# Altium PCB RGBM.PcbDoc (part 3 of 3)
Units mil, origin at the board's own origin, x right, y up, seen from the top; angles counter-clockwise.
Board outline 10650 x 5000 mil, 2 copper layers (Top Layer, Bottom Layer); 598 components, 309 nets, 1806 pads, 0 vias.
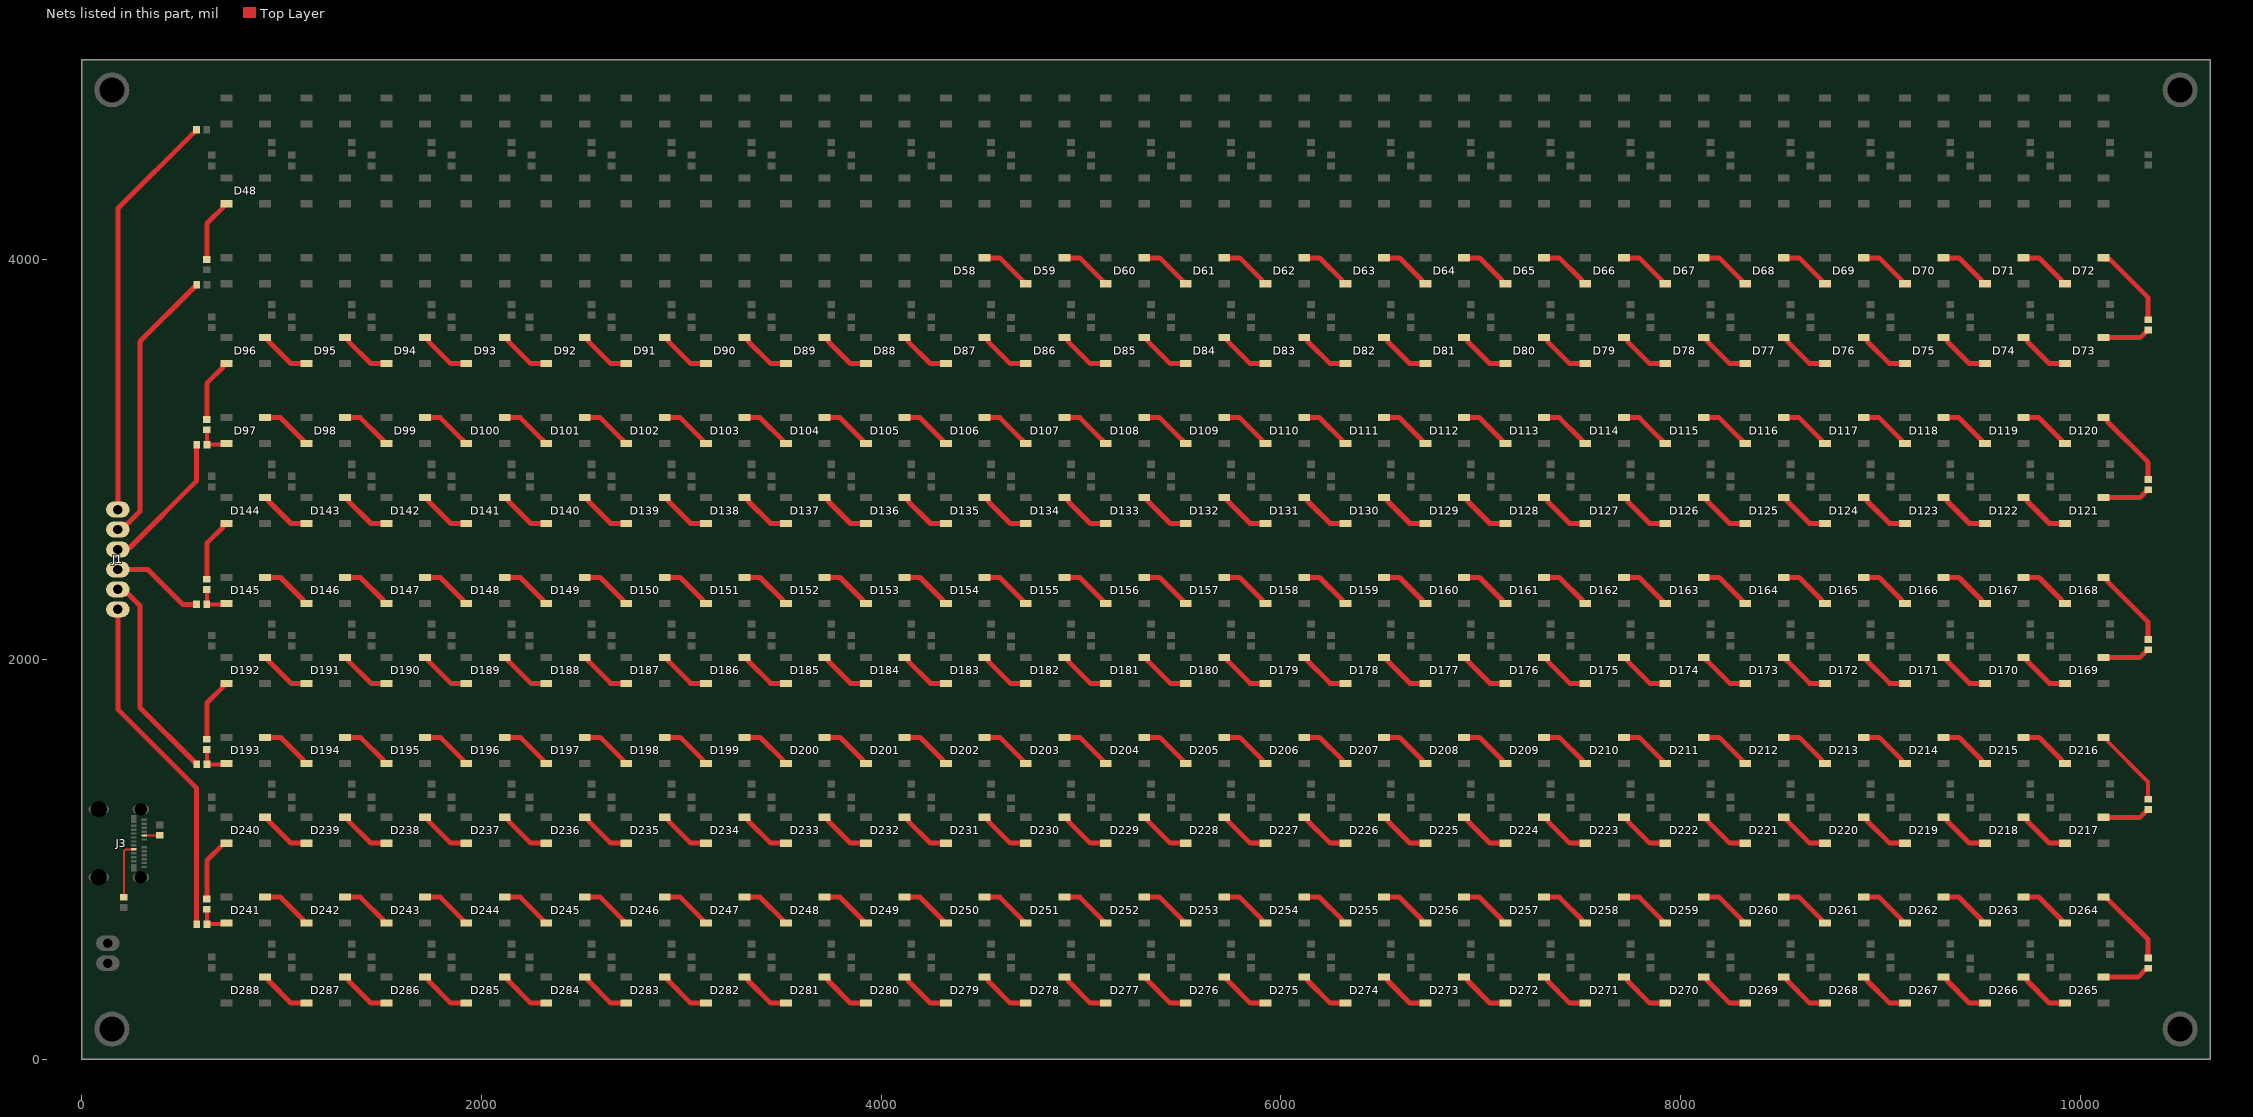
[diagram p3: the nets of this part, all layers, seen from the top]

## Nets (pads, with @x,y where several pads share a name; then routed paths per layer and width w, separated by ;. In a path a pad name is that pad's centre, name@x,y a point inside that pad or via, vN(x,y) a via of type N, cw(c..) or ccw(c..) an arc to the next point about the centre after c; other vN are vias at no path point) (continued)
NetD58_2-DOUT: D58.2-DOUT D59.4-DIN | length 267.8
  Top Layer w25: D58.2-DOUT@4516.46,4009.96 4593.62,4009.96 4706.52,3897.07 4706.52,3885.26 4711.73,3880.04 D59.4-DIN@4723.54,3880.04
NetD59_2-DOUT: D59.2-DOUT D60.4-DIN | length 267.8
  Top Layer w25: D59.2-DOUT@4916.46,4009.96 4993.62,4009.96 5106.52,3897.07 5106.52,3885.26 5111.73,3880.04 D60.4-DIN@5123.54,3880.04
NetD60_2-DOUT: D60.2-DOUT D61.4-DIN | length 267.8
  Top Layer w25: D60.2-DOUT@5316.46,4009.96 5393.62,4009.96 5506.52,3897.07 5506.52,3885.26 5511.73,3880.04 D61.4-DIN@5523.54,3880.04
NetD61_2-DOUT: D61.2-DOUT D62.4-DIN | length 267.8
  Top Layer w25: D61.2-DOUT@5716.46,4009.96 5793.62,4009.96 5906.52,3897.07 5906.52,3885.26 5911.73,3880.04 D62.4-DIN@5923.54,3880.04
NetD62_2-DOUT: D62.2-DOUT D63.4-DIN | length 267.8
  Top Layer w25: D62.2-DOUT@6116.46,4009.96 6193.62,4009.96 6306.52,3897.07 6306.52,3885.26 6311.73,3880.04 D63.4-DIN@6323.54,3880.04
NetD63_2-DOUT: D63.2-DOUT D64.4-DIN | length 267.8
  Top Layer w25: D63.2-DOUT@6516.46,4009.96 6593.62,4009.96 6706.52,3897.07 6706.52,3885.26 6711.73,3880.04 D64.4-DIN@6723.54,3880.04
NetD64_2-DOUT: D64.2-DOUT D65.4-DIN | length 267.8
  Top Layer w25: D64.2-DOUT@6916.46,4009.96 6993.62,4009.96 7106.52,3897.07 7106.52,3885.26 7111.73,3880.04 D65.4-DIN@7123.54,3880.04
NetD65_2-DOUT: D65.2-DOUT D66.4-DIN | length 267.8
  Top Layer w25: D65.2-DOUT@7316.46,4009.96 7393.62,4009.96 7506.52,3897.07 7506.52,3885.26 7511.73,3880.04 D66.4-DIN@7523.54,3880.04
NetD66_2-DOUT: D66.2-DOUT D67.4-DIN | length 267.8
  Top Layer w25: D66.2-DOUT@7716.46,4009.96 7793.62,4009.96 7906.52,3897.07 7906.52,3885.26 7911.73,3880.04 D67.4-DIN@7923.54,3880.04
NetD67_2-DOUT: D67.2-DOUT D68.4-DIN | length 267.8
  Top Layer w25: D67.2-DOUT@8116.46,4009.96 8193.62,4009.96 8306.52,3897.07 8306.52,3885.26 8311.73,3880.04 D68.4-DIN@8323.54,3880.04
NetD68_2-DOUT: D68.2-DOUT D69.4-DIN | length 267.8
  Top Layer w25: D68.2-DOUT@8516.46,4009.96 8593.62,4009.96 8706.52,3897.07 8706.52,3885.26 8711.73,3880.04 D69.4-DIN@8723.54,3880.04
NetD69_2-DOUT: D69.2-DOUT D70.4-DIN | length 267.8
  Top Layer w25: D69.2-DOUT@8916.46,4009.96 8993.62,4009.96 9106.52,3897.07 9106.52,3885.26 9111.73,3880.04 D70.4-DIN@9123.54,3880.04
NetD70_2-DOUT: D70.2-DOUT D71.4-DIN | length 267.8
  Top Layer w25: D70.2-DOUT@9316.46,4009.96 9393.62,4009.96 9506.52,3897.07 9506.52,3885.26 9511.73,3880.04 D71.4-DIN@9523.54,3880.04
NetD71_2-DOUT: D71.2-DOUT D72.4-DIN | length 267.8
  Top Layer w25: D71.2-DOUT@9716.46,4009.96 9793.62,4009.96 9906.52,3897.07 9906.52,3885.26 9911.73,3880.04 D72.4-DIN@9923.54,3880.04
NetD72_2-DOUT: D72.2-DOUT R5.2 | length 420.6
  Top Layer w25: D72.2-DOUT@10116.46,4009.96 10121.67,4004.74 10145.26,4004.74 10340,3810 R5.2@10340,3695.77
NetD73_2-DOUT: D73.2-DOUT D74.4-DIN | length 267.8
  Top Layer w25: D74.4-DIN@9716.46,3609.96 9728.27,3609.96 9733.48,3604.74 9733.48,3592.93 9846.38,3480.04 D73.2-DOUT@9923.54,3480.04
NetD73_4-DIN: D73.4-DIN R5.1 | length 229.3
  Top Layer w25: D73.4-DIN@10116.46,3609.96 10299.96,3609.96 R5.1@10332.36,3642.36
NetD74_2-DOUT: D74.2-DOUT D75.4-DIN | length 267.8
  Top Layer w25: D75.4-DIN@9316.46,3609.96 9328.27,3609.96 9333.48,3604.74 9333.48,3592.93 9446.38,3480.04 D74.2-DOUT@9523.54,3480.04
NetD75_2-DOUT: D75.2-DOUT D76.4-DIN | length 267.8
  Top Layer w25: D76.4-DIN@8916.46,3609.96 8928.27,3609.96 8933.48,3604.74 8933.48,3592.93 9046.38,3480.04 D75.2-DOUT@9123.54,3480.04
NetD76_2-DOUT: D76.2-DOUT D77.4-DIN | length 267.8
  Top Layer w25: D77.4-DIN@8516.46,3609.96 8528.27,3609.96 8533.48,3604.74 8533.48,3592.93 8646.38,3480.04 D76.2-DOUT@8723.54,3480.04
NetD77_2-DOUT: D77.2-DOUT D78.4-DIN | length 267.8
  Top Layer w25: D78.4-DIN@8116.46,3609.96 8128.27,3609.96 8133.48,3604.74 8133.48,3592.93 8246.38,3480.04 D77.2-DOUT@8323.54,3480.04
NetD78_2-DOUT: D78.2-DOUT D79.4-DIN | length 267.8
  Top Layer w25: D79.4-DIN@7716.46,3609.96 7728.27,3609.96 7733.48,3604.74 7733.48,3592.93 7846.38,3480.04 D78.2-DOUT@7923.54,3480.04
NetD79_2-DOUT: D79.2-DOUT D80.4-DIN | length 267.8
  Top Layer w25: D80.4-DIN@7316.46,3609.96 7328.27,3609.96 7333.48,3604.74 7333.48,3592.93 7446.38,3480.04 D79.2-DOUT@7523.54,3480.04
NetD80_2-DOUT: D80.2-DOUT D81.4-DIN | length 267.8
  Top Layer w25: D81.4-DIN@6916.46,3609.96 6928.27,3609.96 6933.48,3604.74 6933.48,3592.93 7046.38,3480.04 D80.2-DOUT@7123.54,3480.04
NetD81_2-DOUT: D81.2-DOUT D82.4-DIN | length 267.8
  Top Layer w25: D82.4-DIN@6516.46,3609.96 6528.27,3609.96 6533.48,3604.74 6533.48,3592.93 6646.38,3480.04 D81.2-DOUT@6723.54,3480.04
NetD82_2-DOUT: D82.2-DOUT D83.4-DIN | length 267.8
  Top Layer w25: D83.4-DIN@6116.46,3609.96 6128.27,3609.96 6133.48,3604.74 6133.48,3592.93 6246.38,3480.04 D82.2-DOUT@6323.54,3480.04
NetD83_2-DOUT: D83.2-DOUT D84.4-DIN | length 267.8
  Top Layer w25: D84.4-DIN@5716.46,3609.96 5728.27,3609.96 5733.48,3604.74 5733.48,3592.93 5846.38,3480.04 D83.2-DOUT@5923.54,3480.04
NetD84_2-DOUT: D84.2-DOUT D85.4-DIN | length 267.8
  Top Layer w25: D85.4-DIN@5316.46,3609.96 5328.27,3609.96 5333.48,3604.74 5333.48,3592.93 5446.38,3480.04 D84.2-DOUT@5523.54,3480.04
NetD85_2-DOUT: D85.2-DOUT D86.4-DIN | length 267.8
  Top Layer w25: D86.4-DIN@4916.46,3609.96 4928.27,3609.96 4933.48,3604.74 4933.48,3592.93 5046.38,3480.04 D85.2-DOUT@5123.54,3480.04
NetD86_2-DOUT: D86.2-DOUT D87.4-DIN | length 267.8
  Top Layer w25: D87.4-DIN@4516.46,3609.96 4528.27,3609.96 4533.48,3604.74 4533.48,3592.93 4646.38,3480.04 D86.2-DOUT@4723.54,3480.04
NetD87_2-DOUT: D87.2-DOUT D88.4-DIN | length 267.8
  Top Layer w25: D88.4-DIN@4116.46,3609.96 4128.27,3609.96 4133.48,3604.74 4133.48,3592.93 4246.38,3480.04 D87.2-DOUT@4323.54,3480.04
NetD88_2-DOUT: D88.2-DOUT D89.4-DIN | length 267.8
  Top Layer w25: D89.4-DIN@3716.46,3609.96 3728.27,3609.96 3733.48,3604.74 3733.48,3592.93 3846.38,3480.04 D88.2-DOUT@3923.54,3480.04
NetD89_2-DOUT: D89.2-DOUT D90.4-DIN | length 267.8
  Top Layer w25: D90.4-DIN@3316.46,3609.96 3328.27,3609.96 3333.48,3604.74 3333.48,3592.93 3446.38,3480.04 D89.2-DOUT@3523.54,3480.04
NetD90_2-DOUT: D90.2-DOUT D91.4-DIN | length 267.8
  Top Layer w25: D91.4-DIN@2916.46,3609.96 2928.27,3609.96 2933.48,3604.74 2933.48,3592.93 3046.38,3480.04 D90.2-DOUT@3123.54,3480.04
NetD91_2-DOUT: D91.2-DOUT D92.4-DIN | length 267.8
  Top Layer w25: D92.4-DIN@2516.46,3609.96 2528.27,3609.96 2533.48,3604.74 2533.48,3592.93 2646.38,3480.04 D91.2-DOUT@2723.54,3480.04
NetD92_2-DOUT: D92.2-DOUT D93.4-DIN | length 267.8
  Top Layer w25: D93.4-DIN@2116.46,3609.96 2128.27,3609.96 2133.48,3604.74 2133.48,3592.93 2246.38,3480.04 D92.2-DOUT@2323.54,3480.04
NetD93_2-DOUT: D93.2-DOUT D94.4-DIN | length 267.8
  Top Layer w25: D94.4-DIN@1716.46,3609.96 1728.27,3609.96 1733.48,3604.74 1733.48,3592.93 1846.38,3480.04 D93.2-DOUT@1923.54,3480.04
NetD94_2-DOUT: D94.2-DOUT D95.4-DIN | length 267.8
  Top Layer w25: D95.4-DIN@1316.46,3609.96 1328.27,3609.96 1333.48,3604.74 1333.48,3592.93 1446.38,3480.04 D94.2-DOUT@1523.54,3480.04
NetD95_2-DOUT: D95.2-DOUT D96.4-DIN | length 267.8
  Top Layer w25: D96.4-DIN@916.46,3609.96 928.27,3609.96 933.48,3604.74 933.48,3592.93 1046.38,3480.04 D95.2-DOUT@1123.54,3480.04
NetD97_2-DOUT: D97.2-DOUT D98.4-DIN | length 267.8
  Top Layer w25: D97.2-DOUT@916.46,3209.96 993.62,3209.96 1106.52,3097.07 1106.52,3085.26 1111.73,3080.04 D98.4-DIN@1123.54,3080.04
NetD97_4-DIN: D97.4-DIN R6.1 R7.2 | length 174.7
  Top Layer w20: R6.1@625,3149.41 625,3075.59 R7.2@625.59,3075 718.5,3075 D97.4-DIN@723.54,3080.04
NetD98_2-DOUT: D98.2-DOUT D99.4-DIN | length 267.8
  Top Layer w25: D98.2-DOUT@1316.46,3209.96 1393.62,3209.96 1506.52,3097.07 1506.52,3085.26 1511.73,3080.04 D99.4-DIN@1523.54,3080.04
NetD99_2-DOUT: D99.2-DOUT D100.4-DIN | length 267.8
  Top Layer w25: D99.2-DOUT@1716.46,3209.96 1793.62,3209.96 1906.52,3097.07 1906.52,3085.26 1911.73,3080.04 D100.4-DIN@1923.54,3080.04
NetD100_2-DOUT: D100.2-DOUT D101.4-DIN | length 267.8
  Top Layer w25: D100.2-DOUT@2116.46,3209.96 2193.62,3209.96 2306.52,3097.07 2306.52,3085.26 2311.73,3080.04 D101.4-DIN@2323.54,3080.04
NetD101_2-DOUT: D101.2-DOUT D102.4-DIN | length 267.8
  Top Layer w25: D101.2-DOUT@2516.46,3209.96 2593.62,3209.96 2706.52,3097.07 2706.52,3085.26 2711.73,3080.04 D102.4-DIN@2723.54,3080.04
NetD102_2-DOUT: D102.2-DOUT D103.4-DIN | length 267.8
  Top Layer w25: D102.2-DOUT@2916.46,3209.96 2993.62,3209.96 3106.52,3097.07 3106.52,3085.26 3111.73,3080.04 D103.4-DIN@3123.54,3080.04
NetD103_2-DOUT: D103.2-DOUT D104.4-DIN | length 267.8
  Top Layer w25: D103.2-DOUT@3316.46,3209.96 3393.62,3209.96 3506.52,3097.07 3506.52,3085.26 3511.73,3080.04 D104.4-DIN@3523.54,3080.04
NetD104_2-DOUT: D104.2-DOUT D105.4-DIN | length 267.8
  Top Layer w25: D104.2-DOUT@3716.46,3209.96 3793.62,3209.96 3906.52,3097.07 3906.52,3085.26 3911.73,3080.04 D105.4-DIN@3923.54,3080.04
NetD105_2-DOUT: D105.2-DOUT D106.4-DIN | length 267.8
  Top Layer w25: D105.2-DOUT@4116.46,3209.96 4193.62,3209.96 4306.52,3097.07 4306.52,3085.26 4311.73,3080.04 D106.4-DIN@4323.54,3080.04
NetD106_2-DOUT: D106.2-DOUT D107.4-DIN | length 267.8
  Top Layer w25: D106.2-DOUT@4516.46,3209.96 4593.62,3209.96 4706.52,3097.07 4706.52,3085.26 4711.73,3080.04 D107.4-DIN@4723.54,3080.04
NetD107_2-DOUT: D107.2-DOUT D108.4-DIN | length 267.8
  Top Layer w25: D107.2-DOUT@4916.46,3209.96 4993.62,3209.96 5106.52,3097.07 5106.52,3085.26 5111.73,3080.04 D108.4-DIN@5123.54,3080.04
NetD108_2-DOUT: D108.2-DOUT D109.4-DIN | length 267.8
  Top Layer w25: D108.2-DOUT@5316.46,3209.96 5393.62,3209.96 5506.52,3097.07 5506.52,3085.26 5511.73,3080.04 D109.4-DIN@5523.54,3080.04
NetD109_2-DOUT: D109.2-DOUT D110.4-DIN | length 267.8
  Top Layer w25: D109.2-DOUT@5716.46,3209.96 5793.62,3209.96 5906.52,3097.07 5906.52,3085.26 5911.73,3080.04 D110.4-DIN@5923.54,3080.04
NetD110_2-DOUT: D110.2-DOUT D111.4-DIN | length 267.8
  Top Layer w25: D110.2-DOUT@6116.46,3209.96 6193.62,3209.96 6306.52,3097.07 6306.52,3085.26 6311.73,3080.04 D111.4-DIN@6323.54,3080.04
NetD111_2-DOUT: D111.2-DOUT D112.4-DIN | length 267.8
  Top Layer w25: D111.2-DOUT@6516.46,3209.96 6593.62,3209.96 6706.52,3097.07 6706.52,3085.26 6711.73,3080.04 D112.4-DIN@6723.54,3080.04
NetD112_2-DOUT: D112.2-DOUT D113.4-DIN | length 267.8
  Top Layer w25: D112.2-DOUT@6916.46,3209.96 6993.62,3209.96 7106.52,3097.07 7106.52,3085.26 7111.73,3080.04 D113.4-DIN@7123.54,3080.04
NetD113_2-DOUT: D113.2-DOUT D114.4-DIN | length 267.8
  Top Layer w25: D113.2-DOUT@7316.46,3209.96 7393.62,3209.96 7506.52,3097.07 7506.52,3085.26 7511.73,3080.04 D114.4-DIN@7523.54,3080.04
NetD114_2-DOUT: D114.2-DOUT D115.4-DIN | length 267.8
  Top Layer w25: D114.2-DOUT@7716.46,3209.96 7793.62,3209.96 7906.52,3097.07 7906.52,3085.26 7911.73,3080.04 D115.4-DIN@7923.54,3080.04
NetD115_2-DOUT: D115.2-DOUT D116.4-DIN | length 267.8
  Top Layer w25: D115.2-DOUT@8116.46,3209.96 8193.62,3209.96 8306.52,3097.07 8306.52,3085.26 8311.73,3080.04 D116.4-DIN@8323.54,3080.04
NetD116_2-DOUT: D116.2-DOUT D117.4-DIN | length 267.8
  Top Layer w25: D116.2-DOUT@8516.46,3209.96 8593.62,3209.96 8706.52,3097.07 8706.52,3085.26 8711.73,3080.04 D117.4-DIN@8723.54,3080.04
NetD117_2-DOUT: D117.2-DOUT D118.4-DIN | length 267.8
  Top Layer w25: D117.2-DOUT@8916.46,3209.96 8993.62,3209.96 9106.52,3097.07 9106.52,3085.26 9111.73,3080.04 D118.4-DIN@9123.54,3080.04
NetD118_2-DOUT: D118.2-DOUT D119.4-DIN | length 267.8
  Top Layer w25: D118.2-DOUT@9316.46,3209.96 9393.62,3209.96 9506.52,3097.07 9506.52,3085.26 9511.73,3080.04 D119.4-DIN@9523.54,3080.04
NetD119_2-DOUT: D119.2-DOUT D120.4-DIN | length 267.8
  Top Layer w25: D119.2-DOUT@9716.46,3209.96 9793.62,3209.96 9906.52,3097.07 9906.52,3085.26 9911.73,3080.04 D120.4-DIN@9923.54,3080.04
NetD120_2-DOUT: D120.2-DOUT R8.2 | length 413.7
  Top Layer w25: D120.2-DOUT@10116.46,3209.96 10128.27,3209.96 10133.48,3204.74 10133.48,3192.93 10340,2986.42 R8.2@10340,2895.77
NetD121_2-DOUT: D121.2-DOUT D122.4-DIN | length 267.8
  Top Layer w25: D122.4-DIN@9716.46,2809.96 9728.27,2809.96 9733.48,2804.74 9733.48,2792.93 9846.38,2680.04 D121.2-DOUT@9923.54,2680.04
NetD121_4-DIN: D121.4-DIN R8.1 | length 242.8
  Top Layer w25: D121.4-DIN@10116.46,2809.96 10299.96,2809.96 10333.8,2843.8 10333.8,2844.59 10340.78,2851.57 R8.1@10341.57,2851.57
NetD122_2-DOUT: D122.2-DOUT D123.4-DIN | length 267.8
  Top Layer w25: D123.4-DIN@9316.46,2809.96 9328.27,2809.96 9333.48,2804.74 9333.48,2792.93 9446.38,2680.04 D122.2-DOUT@9523.54,2680.04
NetD123_2-DOUT: D123.2-DOUT D124.4-DIN | length 267.8
  Top Layer w25: D124.4-DIN@8916.46,2809.96 8928.27,2809.96 8933.48,2804.74 8933.48,2792.93 9046.38,2680.04 D123.2-DOUT@9123.54,2680.04
NetD124_2-DOUT: D124.2-DOUT D125.4-DIN | length 267.8
  Top Layer w25: D125.4-DIN@8516.46,2809.96 8528.27,2809.96 8533.48,2804.74 8533.48,2792.93 8646.38,2680.04 D124.2-DOUT@8723.54,2680.04
NetD125_2-DOUT: D125.2-DOUT D126.4-DIN | length 267.8
  Top Layer w25: D126.4-DIN@8116.46,2809.96 8128.27,2809.96 8133.48,2804.74 8133.48,2792.93 8246.38,2680.04 D125.2-DOUT@8323.54,2680.04
NetD126_2-DOUT: D126.2-DOUT D127.4-DIN | length 267.8
  Top Layer w25: D127.4-DIN@7716.46,2809.96 7728.27,2809.96 7733.48,2804.74 7733.48,2792.93 7846.38,2680.04 D126.2-DOUT@7923.54,2680.04
NetD127_2-DOUT: D127.2-DOUT D128.4-DIN | length 267.8
  Top Layer w25: D128.4-DIN@7316.46,2809.96 7328.27,2809.96 7333.48,2804.74 7333.48,2792.93 7446.38,2680.04 D127.2-DOUT@7523.54,2680.04
NetD128_2-DOUT: D128.2-DOUT D129.4-DIN | length 267.8
  Top Layer w25: D129.4-DIN@6916.46,2809.96 6928.27,2809.96 6933.48,2804.74 6933.48,2792.93 7046.38,2680.04 D128.2-DOUT@7123.54,2680.04
NetD129_2-DOUT: D129.2-DOUT D130.4-DIN | length 267.8
  Top Layer w25: D130.4-DIN@6516.46,2809.96 6528.27,2809.96 6533.48,2804.74 6533.48,2792.93 6646.38,2680.04 D129.2-DOUT@6723.54,2680.04
NetD130_2-DOUT: D130.2-DOUT D131.4-DIN | length 267.8
  Top Layer w25: D131.4-DIN@6116.46,2809.96 6128.27,2809.96 6133.48,2804.74 6133.48,2792.93 6246.38,2680.04 D130.2-DOUT@6323.54,2680.04
NetD131_2-DOUT: D131.2-DOUT D132.4-DIN | length 267.8
  Top Layer w25: D132.4-DIN@5716.46,2809.96 5728.27,2809.96 5733.48,2804.74 5733.48,2792.93 5846.38,2680.04 D131.2-DOUT@5923.54,2680.04
NetD132_2-DOUT: D132.2-DOUT D133.4-DIN | length 267.8
  Top Layer w25: D133.4-DIN@5316.46,2809.96 5328.27,2809.96 5333.48,2804.74 5333.48,2792.93 5446.38,2680.04 D132.2-DOUT@5523.54,2680.04
NetD133_2-DOUT: D133.2-DOUT D134.4-DIN | length 267.8
  Top Layer w25: D134.4-DIN@4916.46,2809.96 4928.27,2809.96 4933.48,2804.74 4933.48,2792.93 5046.38,2680.04 D133.2-DOUT@5123.54,2680.04
NetD134_2-DOUT: D134.2-DOUT D135.4-DIN | length 267.8
  Top Layer w25: D135.4-DIN@4516.46,2809.96 4528.27,2809.96 4533.48,2804.74 4533.48,2792.93 4646.38,2680.04 D134.2-DOUT@4723.54,2680.04
NetD135_2-DOUT: D135.2-DOUT D136.4-DIN | length 267.8
  Top Layer w25: D136.4-DIN@4116.46,2809.96 4128.27,2809.96 4133.48,2804.74 4133.48,2792.93 4246.38,2680.04 D135.2-DOUT@4323.54,2680.04
NetD136_2-DOUT: D136.2-DOUT D137.4-DIN | length 267.8
  Top Layer w25: D137.4-DIN@3716.46,2809.96 3728.27,2809.96 3733.48,2804.74 3733.48,2792.93 3846.38,2680.04 D136.2-DOUT@3923.54,2680.04
NetD137_2-DOUT: D137.2-DOUT D138.4-DIN | length 267.8
  Top Layer w25: D138.4-DIN@3316.46,2809.96 3328.27,2809.96 3333.48,2804.74 3333.48,2792.93 3446.38,2680.04 D137.2-DOUT@3523.54,2680.04
NetD138_2-DOUT: D138.2-DOUT D139.4-DIN | length 267.8
  Top Layer w25: D139.4-DIN@2916.46,2809.96 2928.27,2809.96 2933.48,2804.74 2933.48,2792.93 3046.38,2680.04 D138.2-DOUT@3123.54,2680.04
NetD139_2-DOUT: D139.2-DOUT D140.4-DIN | length 267.8
  Top Layer w25: D140.4-DIN@2516.46,2809.96 2528.27,2809.96 2533.48,2804.74 2533.48,2792.93 2646.38,2680.04 D139.2-DOUT@2723.54,2680.04
NetD140_2-DOUT: D140.2-DOUT D141.4-DIN | length 267.8
  Top Layer w25: D141.4-DIN@2116.46,2809.96 2128.27,2809.96 2133.48,2804.74 2133.48,2792.93 2246.38,2680.04 D140.2-DOUT@2323.54,2680.04
NetD141_2-DOUT: D141.2-DOUT D142.4-DIN | length 267.8
  Top Layer w25: D142.4-DIN@1716.46,2809.96 1728.27,2809.96 1733.48,2804.74 1733.48,2792.93 1846.38,2680.04 D141.2-DOUT@1923.54,2680.04
NetD142_2-DOUT: D142.2-DOUT D143.4-DIN | length 267.8
  Top Layer w25: D143.4-DIN@1316.46,2809.96 1328.27,2809.96 1333.48,2804.74 1333.48,2792.93 1446.38,2680.04 D142.2-DOUT@1523.54,2680.04
NetD143_2-DOUT: D143.2-DOUT D144.4-DIN | length 267.8
  Top Layer w25: D144.4-DIN@916.46,2809.96 928.27,2809.96 933.48,2804.74 933.48,2792.93 1046.38,2680.04 D143.2-DOUT@1123.54,2680.04
NetD145_2-DOUT: D145.2-DOUT D146.4-DIN | length 267.8
  Top Layer w25: D145.2-DOUT@916.46,2409.96 993.62,2409.96 1106.52,2297.07 1106.52,2285.26 1111.73,2280.04 D146.4-DIN@1123.54,2280.04
NetD145_4-DIN: D145.4-DIN R9.1 R10.2 | length 175
  Top Layer w20: R9.1@625,2349.41 R10.2@625,2275 718.5,2275 D145.4-DIN@723.54,2280.04
NetD146_2-DOUT: D146.2-DOUT D147.4-DIN | length 267.8
  Top Layer w25: D146.2-DOUT@1316.46,2409.96 1393.62,2409.96 1506.52,2297.07 1506.52,2285.26 1511.73,2280.04 D147.4-DIN@1523.54,2280.04
NetD147_2-DOUT: D147.2-DOUT D148.4-DIN | length 267.8
  Top Layer w25: D147.2-DOUT@1716.46,2409.96 1793.62,2409.96 1906.52,2297.07 1906.52,2285.26 1911.73,2280.04 D148.4-DIN@1923.54,2280.04
NetD148_2-DOUT: D148.2-DOUT D149.4-DIN | length 267.8
  Top Layer w25: D148.2-DOUT@2116.46,2409.96 2193.62,2409.96 2306.52,2297.07 2306.52,2285.26 2311.73,2280.04 D149.4-DIN@2323.54,2280.04
NetD149_2-DOUT: D149.2-DOUT D150.4-DIN | length 267.8
  Top Layer w25: D149.2-DOUT@2516.46,2409.96 2593.62,2409.96 2706.52,2297.07 2706.52,2285.26 2711.73,2280.04 D150.4-DIN@2723.54,2280.04
NetD150_2-DOUT: D150.2-DOUT D151.4-DIN | length 267.8
  Top Layer w25: D150.2-DOUT@2916.46,2409.96 2993.62,2409.96 3106.52,2297.07 3106.52,2285.26 3111.73,2280.04 D151.4-DIN@3123.54,2280.04
NetD151_2-DOUT: D151.2-DOUT D152.4-DIN | length 267.8
  Top Layer w25: D151.2-DOUT@3316.46,2409.96 3393.62,2409.96 3506.52,2297.07 3506.52,2285.26 3511.73,2280.04 D152.4-DIN@3523.54,2280.04
NetD152_2-DOUT: D152.2-DOUT D153.4-DIN | length 267.8
  Top Layer w25: D152.2-DOUT@3716.46,2409.96 3793.62,2409.96 3906.52,2297.07 3906.52,2285.26 3911.73,2280.04 D153.4-DIN@3923.54,2280.04
NetD153_2-DOUT: D153.2-DOUT D154.4-DIN | length 267.8
  Top Layer w25: D153.2-DOUT@4116.46,2409.96 4193.62,2409.96 4306.52,2297.07 4306.52,2285.26 4311.73,2280.04 D154.4-DIN@4323.54,2280.04
NetD154_2-DOUT: D154.2-DOUT D155.4-DIN | length 267.8
  Top Layer w25: D154.2-DOUT@4516.46,2409.96 4593.62,2409.96 4706.52,2297.07 4706.52,2285.26 4711.73,2280.04 D155.4-DIN@4723.54,2280.04
NetD155_2-DOUT: D155.2-DOUT D156.4-DIN | length 267.8
  Top Layer w25: D155.2-DOUT@4916.46,2409.96 4993.62,2409.96 5106.52,2297.07 5106.52,2285.26 5111.73,2280.04 D156.4-DIN@5123.54,2280.04
NetD156_2-DOUT: D156.2-DOUT D157.4-DIN | length 267.8
  Top Layer w25: D156.2-DOUT@5316.46,2409.96 5393.62,2409.96 5506.52,2297.07 5506.52,2285.26 5511.73,2280.04 D157.4-DIN@5523.54,2280.04
NetD157_2-DOUT: D157.2-DOUT D158.4-DIN | length 267.8
  Top Layer w25: D157.2-DOUT@5716.46,2409.96 5793.62,2409.96 5906.52,2297.07 5906.52,2285.26 5911.73,2280.04 D158.4-DIN@5923.54,2280.04
NetD158_2-DOUT: D158.2-DOUT D159.4-DIN | length 267.8
  Top Layer w25: D158.2-DOUT@6116.46,2409.96 6193.62,2409.96 6306.52,2297.07 6306.52,2285.26 6311.73,2280.04 D159.4-DIN@6323.54,2280.04
NetD159_2-DOUT: D159.2-DOUT D160.4-DIN | length 267.8
  Top Layer w25: D159.2-DOUT@6516.46,2409.96 6593.62,2409.96 6706.52,2297.07 6706.52,2285.26 6711.73,2280.04 D160.4-DIN@6723.54,2280.04
NetD160_2-DOUT: D160.2-DOUT D161.4-DIN | length 267.8
  Top Layer w25: D160.2-DOUT@6916.46,2409.96 6993.62,2409.96 7106.52,2297.07 7106.52,2285.26 7111.73,2280.04 D161.4-DIN@7123.54,2280.04
NetD161_2-DOUT: D161.2-DOUT D162.4-DIN | length 267.8
  Top Layer w25: D161.2-DOUT@7316.46,2409.96 7393.62,2409.96 7506.52,2297.07 7506.52,2285.26 7511.73,2280.04 D162.4-DIN@7523.54,2280.04
NetD162_2-DOUT: D162.2-DOUT D163.4-DIN | length 267.8
  Top Layer w25: D162.2-DOUT@7716.46,2409.96 7793.62,2409.96 7906.52,2297.07 7906.52,2285.26 7911.73,2280.04 D163.4-DIN@7923.54,2280.04
NetD163_2-DOUT: D163.2-DOUT D164.4-DIN | length 267.8
  Top Layer w25: D163.2-DOUT@8116.46,2409.96 8193.62,2409.96 8306.52,2297.07 8306.52,2285.26 8311.73,2280.04 D164.4-DIN@8323.54,2280.04
NetD164_2-DOUT: D164.2-DOUT D165.4-DIN | length 267.8
  Top Layer w25: D164.2-DOUT@8516.46,2409.96 8593.62,2409.96 8706.52,2297.07 8706.52,2285.26 8711.73,2280.04 D165.4-DIN@8723.54,2280.04
NetD165_2-DOUT: D165.2-DOUT D166.4-DIN | length 267.8
  Top Layer w25: D165.2-DOUT@8916.46,2409.96 8993.62,2409.96 9106.52,2297.07 9106.52,2285.26 9111.73,2280.04 D166.4-DIN@9123.54,2280.04
NetD166_2-DOUT: D166.2-DOUT D167.4-DIN | length 267.8
  Top Layer w25: D166.2-DOUT@9316.46,2409.96 9393.62,2409.96 9506.52,2297.07 9506.52,2285.26 9511.73,2280.04 D167.4-DIN@9523.54,2280.04
NetD167_2-DOUT: D167.2-DOUT D168.4-DIN | length 267.8
  Top Layer w25: D167.2-DOUT@9716.46,2409.96 9793.62,2409.96 9906.52,2297.07 9906.52,2285.26 9911.73,2280.04 D168.4-DIN@9923.54,2280.04
NetD168_2-DOUT: D168.2-DOUT R11.2 | length 405.2
  Top Layer w25: D168.2-DOUT@10116.46,2409.96 10128.27,2409.96 10133.48,2404.74 10133.48,2392.93 10340,2186.42 R11.2@10340,2104.23
NetD169_2-DOUT: D169.2-DOUT D170.4-DIN | length 267.8
  Top Layer w25: D170.4-DIN@9716.46,2009.96 9728.27,2009.96 9733.48,2004.74 9733.48,1992.93 9846.38,1880.04 D169.2-DOUT@9923.54,1880.04
NetD169_4-DIN: D169.4-DIN R11.1 | length 226.2
  Top Layer w25: D169.4-DIN@10116.46,2009.96 D169.4-DIN@10116.46,2009.96 10300,2010 R11.1@10330.18,2040.18
NetD170_2-DOUT: D170.2-DOUT D171.4-DIN | length 267.8
  Top Layer w25: D171.4-DIN@9316.46,2009.96 9328.27,2009.96 9333.48,2004.74 9333.48,1992.93 9446.38,1880.04 D170.2-DOUT@9523.54,1880.04
NetD171_2-DOUT: D171.2-DOUT D172.4-DIN | length 267.8
  Top Layer w25: D172.4-DIN@8916.46,2009.96 8928.27,2009.96 8933.48,2004.74 8933.48,1992.93 9046.38,1880.04 D171.2-DOUT@9123.54,1880.04
NetD172_2-DOUT: D172.2-DOUT D173.4-DIN | length 267.8
  Top Layer w25: D173.4-DIN@8516.46,2009.96 8528.27,2009.96 8533.48,2004.74 8533.48,1992.93 8646.38,1880.04 D172.2-DOUT@8723.54,1880.04
NetD173_2-DOUT: D173.2-DOUT D174.4-DIN | length 267.8
  Top Layer w25: D174.4-DIN@8116.46,2009.96 8128.27,2009.96 8133.48,2004.74 8133.48,1992.93 8246.38,1880.04 D173.2-DOUT@8323.54,1880.04
NetD174_2-DOUT: D174.2-DOUT D175.4-DIN | length 267.8
  Top Layer w25: D175.4-DIN@7716.46,2009.96 7728.27,2009.96 7733.48,2004.74 7733.48,1992.93 7846.38,1880.04 D174.2-DOUT@7923.54,1880.04
NetD175_2-DOUT: D175.2-DOUT D176.4-DIN | length 267.8
  Top Layer w25: D176.4-DIN@7316.46,2009.96 7328.27,2009.96 7333.48,2004.74 7333.48,1992.93 7446.38,1880.04 D175.2-DOUT@7523.54,1880.04
NetD176_2-DOUT: D176.2-DOUT D177.4-DIN | length 267.8
  Top Layer w25: D177.4-DIN@6916.46,2009.96 6928.27,2009.96 6933.48,2004.74 6933.48,1992.93 7046.38,1880.04 D176.2-DOUT@7123.54,1880.04
NetD177_2-DOUT: D177.2-DOUT D178.4-DIN | length 267.8
  Top Layer w25: D178.4-DIN@6516.46,2009.96 6528.27,2009.96 6533.48,2004.74 6533.48,1992.93 6646.38,1880.04 D177.2-DOUT@6723.54,1880.04
NetD178_2-DOUT: D178.2-DOUT D179.4-DIN | length 267.8
  Top Layer w25: D179.4-DIN@6116.46,2009.96 6128.27,2009.96 6133.48,2004.74 6133.48,1992.93 6246.38,1880.04 D178.2-DOUT@6323.54,1880.04
NetD179_2-DOUT: D179.2-DOUT D180.4-DIN | length 267.8
  Top Layer w25: D180.4-DIN@5716.46,2009.96 5728.27,2009.96 5733.48,2004.74 5733.48,1992.93 5846.38,1880.04 D179.2-DOUT@5923.54,1880.04
NetD180_2-DOUT: D180.2-DOUT D181.4-DIN | length 267.8
  Top Layer w25: D181.4-DIN@5316.46,2009.96 5328.27,2009.96 5333.48,2004.74 5333.48,1992.93 5446.38,1880.04 D180.2-DOUT@5523.54,1880.04
NetD181_2-DOUT: D181.2-DOUT D182.4-DIN | length 267.8
  Top Layer w25: D182.4-DIN@4916.46,2009.96 4928.27,2009.96 4933.48,2004.74 4933.48,1992.93 5046.38,1880.04 D181.2-DOUT@5123.54,1880.04
NetD182_2-DOUT: D182.2-DOUT D183.4-DIN | length 267.8
  Top Layer w25: D183.4-DIN@4516.46,2009.96 4528.27,2009.96 4533.48,2004.74 4533.48,1992.93 4646.38,1880.04 D182.2-DOUT@4723.54,1880.04
NetD183_2-DOUT: D183.2-DOUT D184.4-DIN | length 267.8
  Top Layer w25: D184.4-DIN@4116.46,2009.96 4128.27,2009.96 4133.48,2004.74 4133.48,1992.93 4246.38,1880.04 D183.2-DOUT@4323.54,1880.04
NetD184_2-DOUT: D184.2-DOUT D185.4-DIN | length 267.8
  Top Layer w25: D185.4-DIN@3716.46,2009.96 3728.27,2009.96 3733.48,2004.74 3733.48,1992.93 3846.38,1880.04 D184.2-DOUT@3923.54,1880.04
NetD185_2-DOUT: D185.2-DOUT D186.4-DIN | length 267.8
  Top Layer w25: D186.4-DIN@3316.46,2009.96 3328.27,2009.96 3333.48,2004.74 3333.48,1992.93 3446.38,1880.04 D185.2-DOUT@3523.54,1880.04
NetD186_2-DOUT: D186.2-DOUT D187.4-DIN | length 267.8
  Top Layer w25: D187.4-DIN@2916.46,2009.96 2928.27,2009.96 2933.48,2004.74 2933.48,1992.93 3046.38,1880.04 D186.2-DOUT@3123.54,1880.04
NetD187_2-DOUT: D187.2-DOUT D188.4-DIN | length 267.8
  Top Layer w25: D188.4-DIN@2516.46,2009.96 2528.27,2009.96 2533.48,2004.74 2533.48,1992.93 2646.38,1880.04 D187.2-DOUT@2723.54,1880.04
NetD188_2-DOUT: D188.2-DOUT D189.4-DIN | length 267.8
  Top Layer w25: D189.4-DIN@2116.46,2009.96 2128.27,2009.96 2133.48,2004.74 2133.48,1992.93 2246.38,1880.04 D188.2-DOUT@2323.54,1880.04
NetD189_2-DOUT: D189.2-DOUT D190.4-DIN | length 267.8
  Top Layer w25: D190.4-DIN@1716.46,2009.96 1728.27,2009.96 1733.48,2004.74 1733.48,1992.93 1846.38,1880.04 D189.2-DOUT@1923.54,1880.04
NetD190_2-DOUT: D190.2-DOUT D191.4-DIN | length 267.8
  Top Layer w25: D191.4-DIN@1316.46,2009.96 1328.27,2009.96 1333.48,2004.74 1333.48,1992.93 1446.38,1880.04 D190.2-DOUT@1523.54,1880.04
NetD191_2-DOUT: D191.2-DOUT D192.4-DIN | length 267.8
  Top Layer w25: D192.4-DIN@916.46,2009.96 928.27,2009.96 933.48,2004.74 933.48,1992.93 1046.38,1880.04 D191.2-DOUT@1123.54,1880.04
NetD193_2-DOUT: D193.2-DOUT D194.4-DIN | length 267.8
  Top Layer w25: D193.2-DOUT@916.46,1609.96 993.62,1609.96 1106.52,1497.07 1106.52,1485.26 1111.73,1480.04 D194.4-DIN@1123.54,1480.04
NetD193_4-DIN: D193.4-DIN R12.1 R13.2 | length 174.7
  Top Layer w20: R12.1@625,1549.41 625,1475.59 R13.2@625.59,1475 718.5,1475 D193.4-DIN@723.54,1480.04
NetD194_2-DOUT: D194.2-DOUT D195.4-DIN | length 267.8
  Top Layer w25: D194.2-DOUT@1316.46,1609.96 1393.62,1609.96 1506.52,1497.07 1506.52,1485.26 1511.73,1480.04 D195.4-DIN@1523.54,1480.04
NetD195_2-DOUT: D195.2-DOUT D196.4-DIN | length 267.8
  Top Layer w25: D195.2-DOUT@1716.46,1609.96 1793.62,1609.96 1906.52,1497.07 1906.52,1485.26 1911.73,1480.04 D196.4-DIN@1923.54,1480.04
NetD196_2-DOUT: D196.2-DOUT D197.4-DIN | length 267.8
  Top Layer w25: D196.2-DOUT@2116.46,1609.96 2193.62,1609.96 2306.52,1497.07 2306.52,1485.26 2311.73,1480.04 D197.4-DIN@2323.54,1480.04
NetD197_2-DOUT: D197.2-DOUT D198.4-DIN | length 267.8
  Top Layer w25: D197.2-DOUT@2516.46,1609.96 2593.62,1609.96 2706.52,1497.07 2706.52,1485.26 2711.73,1480.04 D198.4-DIN@2723.54,1480.04
NetD198_2-DOUT: D198.2-DOUT D199.4-DIN | length 267.8
  Top Layer w25: D198.2-DOUT@2916.46,1609.96 2993.62,1609.96 3106.52,1497.07 3106.52,1485.26 3111.73,1480.04 D199.4-DIN@3123.54,1480.04
NetD199_2-DOUT: D199.2-DOUT D200.4-DIN | length 267.8
  Top Layer w25: D199.2-DOUT@3316.46,1609.96 3393.62,1609.96 3506.52,1497.07 3506.52,1485.26 3511.73,1480.04 D200.4-DIN@3523.54,1480.04
NetD200_2-DOUT: D200.2-DOUT D201.4-DIN | length 267.8
  Top Layer w25: D200.2-DOUT@3716.46,1609.96 3793.62,1609.96 3906.52,1497.07 3906.52,1485.26 3911.73,1480.04 D201.4-DIN@3923.54,1480.04
NetD201_2-DOUT: D201.2-DOUT D202.4-DIN | length 267.8
  Top Layer w25: D201.2-DOUT@4116.46,1609.96 4193.62,1609.96 4306.52,1497.07 4306.52,1485.26 4311.73,1480.04 D202.4-DIN@4323.54,1480.04
NetD202_2-DOUT: D202.2-DOUT D203.4-DIN | length 267.8
  Top Layer w25: D202.2-DOUT@4516.46,1609.96 4593.62,1609.96 4706.52,1497.07 4706.52,1485.26 4711.73,1480.04 D203.4-DIN@4723.54,1480.04
NetD203_2-DOUT: D203.2-DOUT D204.4-DIN | length 267.8
  Top Layer w25: D203.2-DOUT@4916.46,1609.96 4993.62,1609.96 5106.52,1497.07 5106.52,1485.26 5111.73,1480.04 D204.4-DIN@5123.54,1480.04
NetD204_2-DOUT: D204.2-DOUT D205.4-DIN | length 267.8
  Top Layer w25: D204.2-DOUT@5316.46,1609.96 5393.62,1609.96 5506.52,1497.07 5506.52,1485.26 5511.73,1480.04 D205.4-DIN@5523.54,1480.04
NetD205_2-DOUT: D205.2-DOUT D206.4-DIN | length 267.8
  Top Layer w25: D205.2-DOUT@5716.46,1609.96 5793.62,1609.96 5906.52,1497.07 5906.52,1485.26 5911.73,1480.04 D206.4-DIN@5923.54,1480.04
NetD206_2-DOUT: D206.2-DOUT D207.4-DIN | length 267.8
  Top Layer w25: D206.2-DOUT@6116.46,1609.96 6193.62,1609.96 6306.52,1497.07 6306.52,1485.26 6311.73,1480.04 D207.4-DIN@6323.54,1480.04
NetD207_2-DOUT: D207.2-DOUT D208.4-DIN | length 267.8
  Top Layer w25: D207.2-DOUT@6516.46,1609.96 6593.62,1609.96 6706.52,1497.07 6706.52,1485.26 6711.73,1480.04 D208.4-DIN@6723.54,1480.04
NetD208_2-DOUT: D208.2-DOUT D209.4-DIN | length 267.8
  Top Layer w25: D208.2-DOUT@6916.46,1609.96 6993.62,1609.96 7106.52,1497.07 7106.52,1485.26 7111.73,1480.04 D209.4-DIN@7123.54,1480.04
NetD209_2-DOUT: D209.2-DOUT D210.4-DIN | length 267.8
  Top Layer w25: D209.2-DOUT@7316.46,1609.96 7393.62,1609.96 7506.52,1497.07 7506.52,1485.26 7511.73,1480.04 D210.4-DIN@7523.54,1480.04
NetD210_2-DOUT: D210.2-DOUT D211.4-DIN | length 267.8
  Top Layer w25: D210.2-DOUT@7716.46,1609.96 7793.62,1609.96 7906.52,1497.07 7906.52,1485.26 7911.73,1480.04 D211.4-DIN@7923.54,1480.04
NetD211_2-DOUT: D211.2-DOUT D212.4-DIN | length 267.8
  Top Layer w25: D211.2-DOUT@8116.46,1609.96 8193.62,1609.96 8306.52,1497.07 8306.52,1485.26 8311.73,1480.04 D212.4-DIN@8323.54,1480.04
NetD212_2-DOUT: D212.2-DOUT D213.4-DIN | length 267.8
  Top Layer w25: D212.2-DOUT@8516.46,1609.96 8593.62,1609.96 8706.52,1497.07 8706.52,1485.26 8711.73,1480.04 D213.4-DIN@8723.54,1480.04
NetD213_2-DOUT: D213.2-DOUT D214.4-DIN | length 267.8
  Top Layer w25: D213.2-DOUT@8916.46,1609.96 8993.62,1609.96 9106.52,1497.07 9106.52,1485.26 9111.73,1480.04 D214.4-DIN@9123.54,1480.04
NetD214_2-DOUT: D214.2-DOUT D215.4-DIN | length 267.8
  Top Layer w25: D214.2-DOUT@9316.46,1609.96 9393.62,1609.96 9506.52,1497.07 9506.52,1485.26 9511.73,1480.04 D215.4-DIN@9523.54,1480.04
NetD215_2-DOUT: D215.2-DOUT D216.4-DIN | length 267.8
  Top Layer w25: D215.2-DOUT@9716.46,1609.96 9793.62,1609.96 9906.52,1497.07 9906.52,1485.26 9911.73,1480.04 D216.4-DIN@9923.54,1480.04
NetD216_2-DOUT: D216.2-DOUT R14.2 | length 411.7
  Top Layer w20: D216.2-DOUT@10116.46,1609.96 10128.27,1609.96 10135.98,1602.24 10135.98,1590.43 10340,1386.42 R14.2@10340,1297.73
NetD217_2-DOUT: D217.2-DOUT D218.4-DIN | length 267.8
  Top Layer w25: D218.4-DIN@9716.46,1209.96 9728.27,1209.96 9733.48,1204.74 9733.48,1192.93 9846.38,1080.04 D217.2-DOUT@9923.54,1080.04
NetD217_4-DIN: D217.4-DIN R14.1 | length 226.9
  Top Layer w25: D217.4-DIN@10116.46,1209.96 10299.96,1209.96 R14.1@10330.66,1240.66
NetD218_2-DOUT: D218.2-DOUT D219.4-DIN | length 267.8
  Top Layer w25: D219.4-DIN@9316.46,1209.96 9328.27,1209.96 9333.48,1204.74 9333.48,1192.93 9446.38,1080.04 D218.2-DOUT@9523.54,1080.04
NetD219_2-DOUT: D219.2-DOUT D220.4-DIN | length 267.8
  Top Layer w25: D220.4-DIN@8916.46,1209.96 8928.27,1209.96 8933.48,1204.74 8933.48,1192.93 9046.38,1080.04 D219.2-DOUT@9123.54,1080.04
NetD220_2-DOUT: D220.2-DOUT D221.4-DIN | length 267.8
  Top Layer w25: D221.4-DIN@8516.46,1209.96 8528.27,1209.96 8533.48,1204.74 8533.48,1192.93 8646.38,1080.04 D220.2-DOUT@8723.54,1080.04
NetD221_2-DOUT: D221.2-DOUT D222.4-DIN | length 267.8
  Top Layer w25: D222.4-DIN@8116.46,1209.96 8128.27,1209.96 8133.48,1204.74 8133.48,1192.93 8246.38,1080.04 D221.2-DOUT@8323.54,1080.04
NetD222_2-DOUT: D222.2-DOUT D223.4-DIN | length 267.8
  Top Layer w25: D223.4-DIN@7716.46,1209.96 7728.27,1209.96 7733.48,1204.74 7733.48,1192.93 7846.38,1080.04 D222.2-DOUT@7923.54,1080.04
NetD223_2-DOUT: D223.2-DOUT D224.4-DIN | length 267.8
  Top Layer w25: D224.4-DIN@7316.46,1209.96 7328.27,1209.96 7333.48,1204.74 7333.48,1192.93 7446.38,1080.04 D223.2-DOUT@7523.54,1080.04
NetD224_2-DOUT: D224.2-DOUT D225.4-DIN | length 267.8
  Top Layer w25: D225.4-DIN@6916.46,1209.96 6928.27,1209.96 6933.48,1204.74 6933.48,1192.93 7046.38,1080.04 D224.2-DOUT@7123.54,1080.04
NetD225_2-DOUT: D225.2-DOUT D226.4-DIN | length 267.8
  Top Layer w25: D226.4-DIN@6516.46,1209.96 6528.27,1209.96 6533.48,1204.74 6533.48,1192.93 6646.38,1080.04 D225.2-DOUT@6723.54,1080.04
NetD226_2-DOUT: D226.2-DOUT D227.4-DIN | length 267.8
  Top Layer w25: D227.4-DIN@6116.46,1209.96 6128.27,1209.96 6133.48,1204.74 6133.48,1192.93 6246.38,1080.04 D226.2-DOUT@6323.54,1080.04
NetD227_2-DOUT: D227.2-DOUT D228.4-DIN | length 267.8
  Top Layer w25: D228.4-DIN@5716.46,1209.96 5728.27,1209.96 5733.48,1204.74 5733.48,1192.93 5846.38,1080.04 D227.2-DOUT@5923.54,1080.04
NetD228_2-DOUT: D228.2-DOUT D229.4-DIN | length 267.8
  Top Layer w25: D229.4-DIN@5316.46,1209.96 5328.27,1209.96 5333.48,1204.74 5333.48,1192.93 5446.38,1080.04 D228.2-DOUT@5523.54,1080.04
NetD229_2-DOUT: D229.2-DOUT D230.4-DIN | length 267.8
  Top Layer w25: D230.4-DIN@4916.46,1209.96 4928.27,1209.96 4933.48,1204.74 4933.48,1192.93 5046.38,1080.04 D229.2-DOUT@5123.54,1080.04
NetD230_2-DOUT: D230.2-DOUT D231.4-DIN | length 267.8
  Top Layer w25: D231.4-DIN@4516.46,1209.96 4528.27,1209.96 4533.48,1204.74 4533.48,1192.93 4646.38,1080.04 D230.2-DOUT@4723.54,1080.04
NetD231_2-DOUT: D231.2-DOUT D232.4-DIN | length 267.8
  Top Layer w25: D232.4-DIN@4116.46,1209.96 4128.27,1209.96 4133.48,1204.74 4133.48,1192.93 4246.38,1080.04 D231.2-DOUT@4323.54,1080.04
NetD232_2-DOUT: D232.2-DOUT D233.4-DIN | length 267.8
  Top Layer w25: D233.4-DIN@3716.46,1209.96 3728.27,1209.96 3733.48,1204.74 3733.48,1192.93 3846.38,1080.04 D232.2-DOUT@3923.54,1080.04
NetD233_2-DOUT: D233.2-DOUT D234.4-DIN | length 267.8
  Top Layer w25: D234.4-DIN@3316.46,1209.96 3328.27,1209.96 3333.48,1204.74 3333.48,1192.93 3446.38,1080.04 D233.2-DOUT@3523.54,1080.04
NetD234_2-DOUT: D234.2-DOUT D235.4-DIN | length 267.8
  Top Layer w25: D235.4-DIN@2916.46,1209.96 2928.27,1209.96 2933.48,1204.74 2933.48,1192.93 3046.38,1080.04 D234.2-DOUT@3123.54,1080.04
NetD235_2-DOUT: D235.2-DOUT D236.4-DIN | length 267.8
  Top Layer w25: D236.4-DIN@2516.46,1209.96 2528.27,1209.96 2533.48,1204.74 2533.48,1192.93 2646.38,1080.04 D235.2-DOUT@2723.54,1080.04
NetD236_2-DOUT: D236.2-DOUT D237.4-DIN | length 267.8
  Top Layer w25: D237.4-DIN@2116.46,1209.96 2128.27,1209.96 2133.48,1204.74 2133.48,1192.93 2246.38,1080.04 D236.2-DOUT@2323.54,1080.04
NetD237_2-DOUT: D237.2-DOUT D238.4-DIN | length 267.8
  Top Layer w25: D238.4-DIN@1716.46,1209.96 1728.27,1209.96 1733.48,1204.74 1733.48,1192.93 1846.38,1080.04 D237.2-DOUT@1923.54,1080.04
NetD238_2-DOUT: D238.2-DOUT D239.4-DIN | length 267.8
  Top Layer w25: D239.4-DIN@1316.46,1209.96 1328.27,1209.96 1333.48,1204.74 1333.48,1192.93 1446.38,1080.04 D238.2-DOUT@1523.54,1080.04
NetD239_2-DOUT: D239.2-DOUT D240.4-DIN | length 267.8
  Top Layer w25: D240.4-DIN@916.46,1209.96 928.27,1209.96 933.48,1204.74 933.48,1192.93 1046.38,1080.04 D239.2-DOUT@1123.54,1080.04
NetD241_2-DOUT: D241.2-DOUT D242.4-DIN | length 267.8
  Top Layer w25: D241.2-DOUT@916.46,809.96 993.62,809.96 1106.52,697.07 1106.52,685.26 1111.73,680.04 D242.4-DIN@1123.54,680.04
NetD241_4-DIN: D241.4-DIN R15.1 R16.2 | length 174.7
  Top Layer w20: R15.1@625,749.41 625,675.59 R16.2@625.59,675 718.5,675 D241.4-DIN@723.54,680.04
NetD242_2-DOUT: D242.2-DOUT D243.4-DIN | length 267.8
  Top Layer w25: D242.2-DOUT@1316.46,809.96 1393.62,809.96 1506.52,697.07 1506.52,685.26 1511.73,680.04 D243.4-DIN@1523.54,680.04
NetD243_2-DOUT: D243.2-DOUT D244.4-DIN | length 267.8
  Top Layer w25: D243.2-DOUT@1716.46,809.96 1793.62,809.96 1906.52,697.07 1906.52,685.26 1911.73,680.04 D244.4-DIN@1923.54,680.04
NetD244_2-DOUT: D244.2-DOUT D245.4-DIN | length 267.8
  Top Layer w25: D244.2-DOUT@2116.46,809.96 2193.62,809.96 2306.52,697.07 2306.52,685.26 2311.73,680.04 D245.4-DIN@2323.54,680.04
NetD245_2-DOUT: D245.2-DOUT D246.4-DIN | length 267.8
  Top Layer w25: D245.2-DOUT@2516.46,809.96 2593.62,809.96 2706.52,697.07 2706.52,685.26 2711.73,680.04 D246.4-DIN@2723.54,680.04
NetD246_2-DOUT: D246.2-DOUT D247.4-DIN | length 267.8
  Top Layer w25: D246.2-DOUT@2916.46,809.96 2993.62,809.96 3106.52,697.07 3106.52,685.26 3111.73,680.04 D247.4-DIN@3123.54,680.04
NetD247_2-DOUT: D247.2-DOUT D248.4-DIN | length 267.8
  Top Layer w25: D247.2-DOUT@3316.46,809.96 3393.62,809.96 3506.52,697.07 3506.52,685.26 3511.73,680.04 D248.4-DIN@3523.54,680.04
NetD248_2-DOUT: D248.2-DOUT D249.4-DIN | length 267.8
  Top Layer w25: D248.2-DOUT@3716.46,809.96 3793.62,809.96 3906.52,697.07 3906.52,685.26 3911.73,680.04 D249.4-DIN@3923.54,680.04
NetD249_2-DOUT: D249.2-DOUT D250.4-DIN | length 267.8
  Top Layer w25: D249.2-DOUT@4116.46,809.96 4193.62,809.96 4306.52,697.07 4306.52,685.26 4311.73,680.04 D250.4-DIN@4323.54,680.04
NetD250_2-DOUT: D250.2-DOUT D251.4-DIN | length 267.8
  Top Layer w25: D250.2-DOUT@4516.46,809.96 4593.62,809.96 4706.52,697.07 4706.52,685.26 4711.73,680.04 D251.4-DIN@4723.54,680.04
NetD251_2-DOUT: D251.2-DOUT D252.4-DIN | length 267.8
  Top Layer w25: D251.2-DOUT@4916.46,809.96 4993.62,809.96 5106.52,697.07 5106.52,685.26 5111.73,680.04 D252.4-DIN@5123.54,680.04
NetD252_2-DOUT: D252.2-DOUT D253.4-DIN | length 267.8
  Top Layer w25: D252.2-DOUT@5316.46,809.96 5393.62,809.96 5506.52,697.07 5506.52,685.26 5511.73,680.04 D253.4-DIN@5523.54,680.04
NetD253_2-DOUT: D253.2-DOUT D254.4-DIN | length 267.8
  Top Layer w25: D253.2-DOUT@5716.46,809.96 5793.62,809.96 5906.52,697.07 5906.52,685.26 5911.73,680.04 D254.4-DIN@5923.54,680.04
NetD254_2-DOUT: D254.2-DOUT D255.4-DIN | length 267.8
  Top Layer w25: D254.2-DOUT@6116.46,809.96 6193.62,809.96 6306.52,697.07 6306.52,685.26 6311.73,680.04 D255.4-DIN@6323.54,680.04
NetD255_2-DOUT: D255.2-DOUT D256.4-DIN | length 267.8
  Top Layer w25: D255.2-DOUT@6516.46,809.96 6593.62,809.96 6706.52,697.07 6706.52,685.26 6711.73,680.04 D256.4-DIN@6723.54,680.04
NetD256_2-DOUT: D256.2-DOUT D257.4-DIN | length 267.8
  Top Layer w25: D256.2-DOUT@6916.46,809.96 6993.62,809.96 7106.52,697.07 7106.52,685.26 7111.73,680.04 D257.4-DIN@7123.54,680.04
NetD257_2-DOUT: D257.2-DOUT D258.4-DIN | length 267.8
  Top Layer w25: D257.2-DOUT@7316.46,809.96 7393.62,809.96 7506.52,697.07 7506.52,685.26 7511.73,680.04 D258.4-DIN@7523.54,680.04
NetD258_2-DOUT: D258.2-DOUT D259.4-DIN | length 267.8
  Top Layer w25: D258.2-DOUT@7716.46,809.96 7793.62,809.96 7906.52,697.07 7906.52,685.26 7911.73,680.04 D259.4-DIN@7923.54,680.04
NetD259_2-DOUT: D259.2-DOUT D260.4-DIN | length 267.8
  Top Layer w25: D259.2-DOUT@8116.46,809.96 8193.62,809.96 8306.52,697.07 8306.52,685.26 8311.73,680.04 D260.4-DIN@8323.54,680.04
NetD260_2-DOUT: D260.2-DOUT D261.4-DIN | length 267.8
  Top Layer w25: D260.2-DOUT@8516.46,809.96 8593.62,809.96 8706.52,697.07 8706.52,685.26 8711.73,680.04 D261.4-DIN@8723.54,680.04
NetD261_2-DOUT: D261.2-DOUT D262.4-DIN | length 267.8
  Top Layer w25: D261.2-DOUT@8916.46,809.96 8993.62,809.96 9106.52,697.07 9106.52,685.26 9111.73,680.04 D262.4-DIN@9123.54,680.04
NetD262_2-DOUT: D262.2-DOUT D263.4-DIN | length 267.8
  Top Layer w25: D262.2-DOUT@9316.46,809.96 9393.62,809.96 9506.52,697.07 9506.52,685.26 9511.73,680.04 D263.4-DIN@9523.54,680.04
NetD263_2-DOUT: D263.2-DOUT D264.4-DIN | length 267.8
  Top Layer w25: D263.2-DOUT@9716.46,809.96 9793.62,809.96 9906.52,697.07 9906.52,685.26 9911.73,680.04 D264.4-DIN@9923.54,680.04
NetD264_2-DOUT: D264.2-DOUT R17.2 | length 403.9
  Top Layer w25: D264.2-DOUT@10116.46,809.96 10128.27,809.96 10340,598.23 R17.2@10340,505.59
NetD265_2-DOUT: D265.2-DOUT D266.4-DIN | length 267.8
  Top Layer w25: D266.4-DIN@9716.46,409.96 9728.27,409.96 9733.48,404.74 9733.48,392.93 9846.38,280.04 D265.2-DOUT@9923.54,280.04
NetD265_4-DIN: D265.4-DIN R17.1 | length 228.3
  Top Layer w25: D265.4-DIN@10116.46,409.96 10289.96,409.96 R17.1@10328.71,448.71
NetD266_2-DOUT: D266.2-DOUT D267.4-DIN | length 267.8
  Top Layer w25: D267.4-DIN@9316.46,409.96 9328.27,409.96 9333.48,404.74 9333.48,392.93 9446.38,280.04 D266.2-DOUT@9523.54,280.04
NetD267_2-DOUT: D267.2-DOUT D268.4-DIN | length 267.8
  Top Layer w25: D268.4-DIN@8916.46,409.96 8928.27,409.96 8933.48,404.74 8933.48,392.93 9046.38,280.04 D267.2-DOUT@9123.54,280.04
NetD268_2-DOUT: D268.2-DOUT D269.4-DIN | length 267.8
  Top Layer w25: D269.4-DIN@8516.46,409.96 8528.27,409.96 8533.48,404.74 8533.48,392.93 8646.38,280.04 D268.2-DOUT@8723.54,280.04
NetD269_2-DOUT: D269.2-DOUT D270.4-DIN | length 267.8
  Top Layer w25: D270.4-DIN@8116.46,409.96 8128.27,409.96 8133.48,404.74 8133.48,392.93 8246.38,280.04 D269.2-DOUT@8323.54,280.04
NetD270_2-DOUT: D270.2-DOUT D271.4-DIN | length 267.8
  Top Layer w25: D271.4-DIN@7716.46,409.96 7728.27,409.96 7733.48,404.74 7733.48,392.93 7846.38,280.04 D270.2-DOUT@7923.54,280.04
NetD271_2-DOUT: D271.2-DOUT D272.4-DIN | length 267.8
  Top Layer w25: D272.4-DIN@7316.46,409.96 7328.27,409.96 7333.48,404.74 7333.48,392.93 7446.38,280.04 D271.2-DOUT@7523.54,280.04
NetD272_2-DOUT: D272.2-DOUT D273.4-DIN | length 267.8
  Top Layer w25: D273.4-DIN@6916.46,409.96 6928.27,409.96 6933.48,404.74 6933.48,392.93 7046.38,280.04 D272.2-DOUT@7123.54,280.04
NetD273_2-DOUT: D273.2-DOUT D274.4-DIN | length 267.8
  Top Layer w25: D274.4-DIN@6516.46,409.96 6528.27,409.96 6533.48,404.74 6533.48,392.93 6646.38,280.04 D273.2-DOUT@6723.54,280.04
NetD274_2-DOUT: D274.2-DOUT D275.4-DIN | length 267.8
  Top Layer w25: D275.4-DIN@6116.46,409.96 6128.27,409.96 6133.48,404.74 6133.48,392.93 6246.38,280.04 D274.2-DOUT@6323.54,280.04
NetD275_2-DOUT: D275.2-DOUT D276.4-DIN | length 267.8
  Top Layer w25: D276.4-DIN@5716.46,409.96 5728.27,409.96 5733.48,404.74 5733.48,392.93 5846.38,280.04 D275.2-DOUT@5923.54,280.04
NetD276_2-DOUT: D276.2-DOUT D277.4-DIN | length 267.8
  Top Layer w25: D277.4-DIN@5316.46,409.96 5328.27,409.96 5333.48,404.74 5333.48,392.93 5446.38,280.04 D276.2-DOUT@5523.54,280.04
NetD277_2-DOUT: D277.2-DOUT D278.4-DIN | length 267.8
  Top Layer w25: D278.4-DIN@4916.46,409.96 4928.27,409.96 4933.48,404.74 4933.48,392.93 5046.38,280.04 D277.2-DOUT@5123.54,280.04
NetD278_2-DOUT: D278.2-DOUT D279.4-DIN | length 267.8
  Top Layer w25: D279.4-DIN@4516.46,409.96 4528.27,409.96 4533.48,404.74 4533.48,392.93 4646.38,280.04 D278.2-DOUT@4723.54,280.04
NetD279_2-DOUT: D279.2-DOUT D280.4-DIN | length 267.8
  Top Layer w25: D280.4-DIN@4116.46,409.96 4128.27,409.96 4133.48,404.74 4133.48,392.93 4246.38,280.04 D279.2-DOUT@4323.54,280.04
NetD280_2-DOUT: D280.2-DOUT D281.4-DIN | length 267.8
  Top Layer w25: D281.4-DIN@3716.46,409.96 3728.27,409.96 3733.48,404.74 3733.48,392.93 3846.38,280.04 D280.2-DOUT@3923.54,280.04
NetD281_2-DOUT: D281.2-DOUT D282.4-DIN | length 267.8
  Top Layer w25: D282.4-DIN@3316.46,409.96 3328.27,409.96 3333.48,404.74 3333.48,392.93 3446.38,280.04 D281.2-DOUT@3523.54,280.04
NetD282_2-DOUT: D282.2-DOUT D283.4-DIN | length 267.8
  Top Layer w25: D283.4-DIN@2916.46,409.96 2928.27,409.96 2933.48,404.74 2933.48,392.93 3046.38,280.04 D282.2-DOUT@3123.54,280.04
NetD283_2-DOUT: D283.2-DOUT D284.4-DIN | length 267.8
  Top Layer w25: D284.4-DIN@2516.46,409.96 2528.27,409.96 2533.48,404.74 2533.48,392.93 2646.38,280.04 D283.2-DOUT@2723.54,280.04
NetD284_2-DOUT: D284.2-DOUT D285.4-DIN | length 267.8
  Top Layer w25: D285.4-DIN@2116.46,409.96 2128.27,409.96 2133.48,404.74 2133.48,392.93 2246.38,280.04 D284.2-DOUT@2323.54,280.04
NetD285_2-DOUT: D285.2-DOUT D286.4-DIN | length 267.8
  Top Layer w25: D286.4-DIN@1716.46,409.96 1728.27,409.96 1733.48,404.74 1733.48,392.93 1846.38,280.04 D285.2-DOUT@1923.54,280.04
NetD286_2-DOUT: D286.2-DOUT D287.4-DIN | length 267.8
  Top Layer w25: D287.4-DIN@1316.46,409.96 1328.27,409.96 1333.48,404.74 1333.48,392.93 1446.38,280.04 D286.2-DOUT@1523.54,280.04
NetD287_2-DOUT: D287.2-DOUT D288.4-DIN | length 267.8
  Top Layer w25: D288.4-DIN@916.46,409.96 928.27,409.96 933.48,404.74 933.48,392.93 1046.38,280.04 D287.2-DOUT@1123.54,280.04
NetJ3_A5: J3.A5 R18.1 | length 79.4
  Top Layer w10: J3.A5@311.18,1118.58 388.58,1118.58 R18.1@390,1120
NetJ3_B5: J3.B5 R19.1 | length 284
  Top Layer w10: R19.1@210,810 210,1040 219.68,1049.68 J3.B5@260,1049.68
ROW_2_3: D48.2-DOUT R3.2 | length 326.6
  Top Layer w25: R3.2@625,4001.18 625,4181.5 706.52,4263.01 706.52,4274.82 711.73,4280.04 D48.2-DOUT@723.54,4280.04
ROW_4_5: D96.2-DOUT R6.2 | length 327.2
  Top Layer w25: R6.2@625,3200.59 625,3381.5 706.52,3463.01 706.52,3474.82 711.73,3480.04 D96.2-DOUT@723.54,3480.04
ROW_6_7: D144.2-DOUT R9.2 | length 327.2
  Top Layer w25: R9.2@625,2400.59 625,2581.5 706.52,2663.01 706.52,2674.82 711.73,2680.04 D144.2-DOUT@723.54,2680.04
ROW_8_9: D192.2-DOUT R12.2 | length 327.2
  Top Layer w25: R12.2@625,1600.59 625,1781.5 706.52,1863.01 706.52,1874.82 711.73,1880.04 D192.2-DOUT@723.54,1880.04
ROW_10_11: D240.2-DOUT R15.2 | length 327.2
  Top Layer w25: R15.2@625,800.59 625,993.31 711.73,1080.04 D240.2-DOUT@723.54,1080.04
SIG1: J1.1 R1.1 | length 2064.3
  Top Layer w25: J1.1@180,2750 180,4256.18 567.62,4643.8 569.59,4643.8 573.82,4648.03 R1.1@573.82,4650
SIG2: J1.2 R4.1 | length 1401.2
  Top Layer w25: J1.2@180,2650 200,2650 290,2740 290,3590.59 568.21,3868.8 570.18,3868.8 574.41,3873.03 R4.1@574.41,3875
SIG3: J1.3 R7.1 | length 717.7
  Top Layer w25: J1.3@180,2550 190.28,2560.28 240.28,2560.28 574.41,2894.41 R7.1@574.41,3075
SIG4: J1.4 R10.1 | length 466.3
  Top Layer w25: J1.4@180,2450 330,2450 505,2275 R10.1@573.82,2275
SIG5: J1.5 R13.1 | length 1057.1
  Top Layer w25: J1.5@180,2350 210,2350 290,2270 290,1759.41 568.21,1481.2 570.18,1481.2 574.41,1476.97 R13.1@574.41,1475
SIG6: J1.6 R16.1 | length 1738.4
  Top Layer w25: J1.6@180,2250 180,1750 574.41,1355.59 R16.1@574.41,675
pads on no net: D288.2-DOUT J3.A2 J3.A3 J3.A6 J3.A7 J3.A8 J3.A10 J3.A11 J3.B2 J3.B3 J3.B6 J3.B7 J3.B8 J3.B10 J3.B11

## Polygon pours and split planes (outlines as drawn)
GND on Top Layer "GND_L01_P002" (solid, pour order 2): 25,4975 10625,4975 10625,25 25,25
+5V on Top Layer "+5V_L01_P001" (solid, pour order 1): 340,1010 240,1010 240,1040 280,1040 280,1110 240,1110 240,1150 330,1150 330,1130 300,1130 300,1090 420,1090 420,630 875,630 875,540 60,540 60,630 340,630
+5V on Top Layer "+5V_L01_P000" (solid, pour order 0): 800,440 880,440 880,4600 800,4600

## Other copper
Top Layer:
  pour cut-out: 320,4940 560,4940 560,4900 320,4900
  text "MCCULLAGH" at 327.39,4905.48 h40

## Silkscreen, mask and mechanical layers (free items; w line width, h text height)
Top Overlay:
  text "Designed by Hunter McCullagh" at 61.32,4672.97 h60 r270
  text "RGB 24x12 Matrix" at 110.96,4581.33 h80 r270
Board Outline:
  lines w5: 0,25 ccw(c25,25) 25,0 10625,0 ccw(c10625,25) 10650,25 10650,4975 ccw(c10625,4975) 10625,5000 25,5000 ccw(c25,4975) 0,4975 0,25